# EAGLE board ZumoAdapterboardv1 (EAGLE 6.6.0)
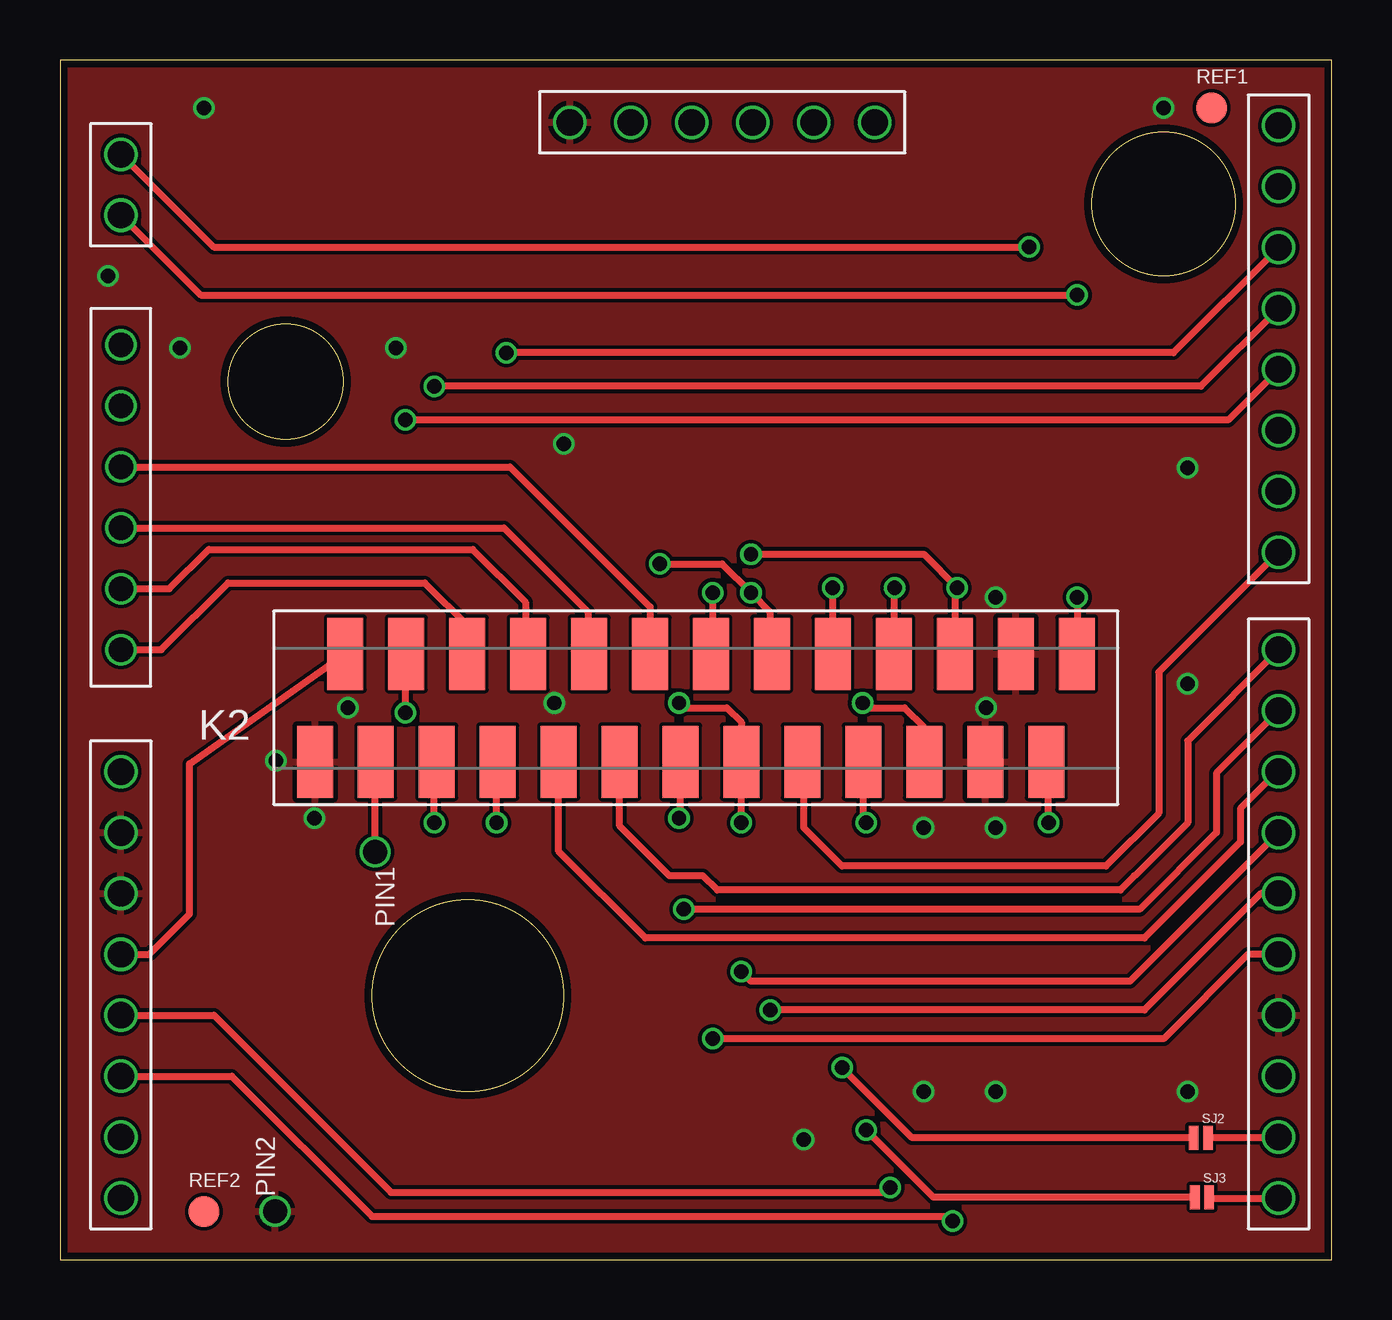
[diagram p0: board, top side]
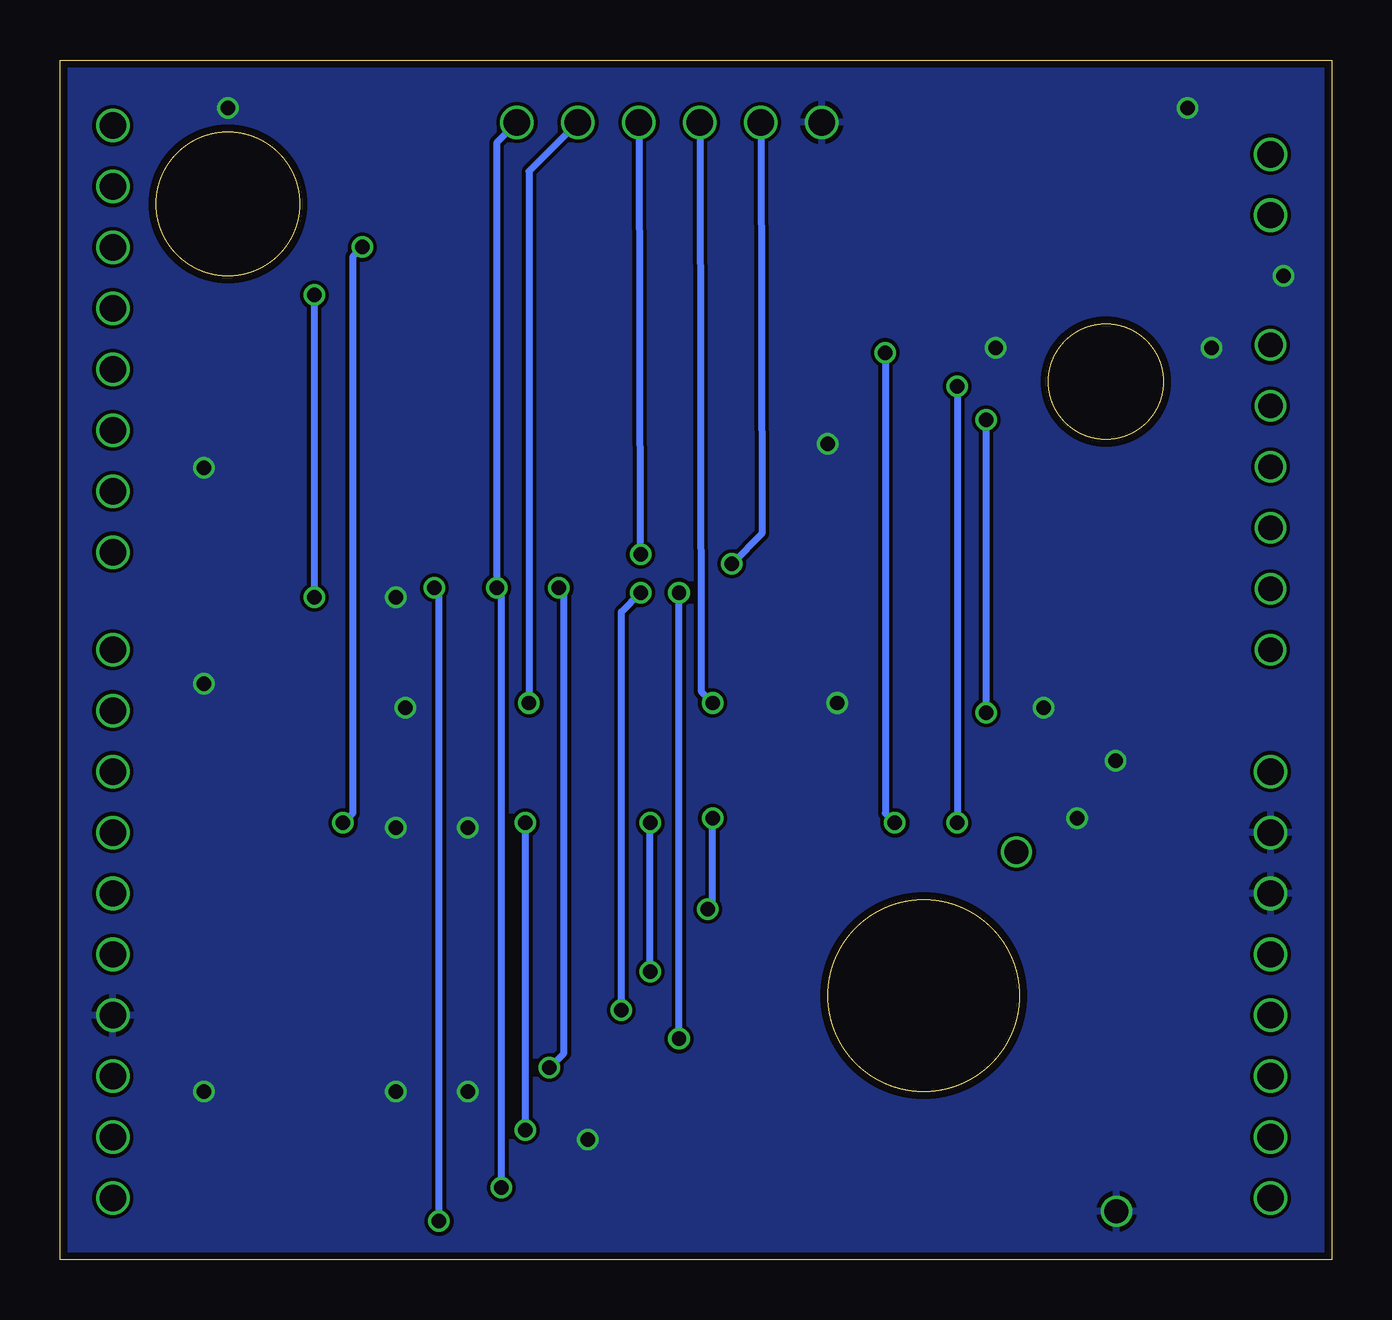
[diagram p1: board, bottom side, seen from below]

Size 53 x 50 mm. Coordinates in mm from the lower left corner, seen from the top.
Outline: 0,0 53,0 53,50 0,50 0,0
Outline: circle at 17,11 radius 4
Outline: circle at 9.4,36.6 radius 2.4
Outline: circle at 46,44 radius 3
Copper layers (1*16): Top 0.035mm / dielectric 1.5mm / Bottom 0.035mm
Design rules "Eagle-DRU - 1109 - LeitOn - 01 and 02 layers KK": minimum track width 0.15mm, minimum drill 0.3mm, track to track 0.15mm, track to pad 0.15mm, pad to pad 0.15mm, via to via 0.15mm, smd to smd 0.15mm, copper to edge 0.3mm, drill to drill 0.3mm, minimum pad ring 0.15mm, minimum via ring 0.15mm, stop-mask expansion 0.05mm, vias tented up to drill 0.3mm, thermal gap 0.2mm
Net classes: 1 sens: width 0.3 mm, drill 0.6 mm, clearance 1.016 mm

## Footprints (pad centres in the part's own frame; a part is rotated, then mirrored left to right if it is on the bottom)
61300611121 = drill 1.1: 1 -6.35,0; 2 -3.81,0; 3 -1.27,0; 4 1.27,0; 5 3.81,0; 6 6.35,0
690357282676 = smd 1.5 x 3: 1 -15.875,-2.25; 2 -14.605,2.25; 3 -13.335,-2.25; 4 -12.065,2.25; 5 -10.795,-2.25; 6 -9.525,2.25; 7 -8.255,-2.25; 8 -6.985,2.25; 9 -5.715,-2.25; 10 -4.445,2.25; 11 -3.175,-2.25; 12 -1.905,2.25; 13 -0.635,-2.25; 14 0.635,2.25; 15 1.905,-2.25; 16 3.175,2.25; 17 4.445,-2.25; 18 5.715,2.25; 19 6.985,-2.25; 20 8.255,2.25; 21 9.525,-2.25; 22 10.795,2.25; 23 12.065,-2.25; 24 13.335,2.25; 25 14.605,-2.25; 26 15.875,2.25
61300811121 = drill 1.1: 1 -8.89,0; 2 -6.35,0; 3 -3.81,0; 4 -1.27,0; 5 1.27,0; 6 3.81,0; 7 6.35,0; 8 8.89,0
61301011121 = drill 1.1: 1 -11.43,0; 2 -8.89,0; 3 -6.35,0; 4 -3.81,0; 5 -1.27,0; 6 1.27,0; 7 3.81,0; 8 6.35,0; 9 8.89,0; 10 11.43,0
61300611821 = drill 1.02: 1 -6.35,0; 2 -3.81,0; 3 -1.27,0; 4 1.27,0; 5 3.81,0; 6 6.35,0
61300211121 = drill 1.1: 1 -1.27,0; 2 1.27,0
SOLDER_PIN_1.0 = drill 1: _ 0,0
PCB-REF = smd 1.27 x 1.27: 0 0,0
SJ-O = smd 0.4 x 1: 1 -0.3,0; 2 0.3,0

## Placement (x,y rotation side)
K1  61300611121  [61300611121]  27.6,47.4 0 top
K2  690357282676  [690357282676]  26.5,23 180 top
K3  61300811121  [61300811121]  2.54,11.45 90 top
K4  61300811121  [61300811121]  50.8,38.37 270 top
K5  61301011121  [61301011121]  50.8,13.99 270 top
K6  61300611821  [61300611821]  2.54,31.77 90 top
K7  61300211121  [61300211121]  2.54,44.8 90 top
PIN1  SOLDER_PIN-1.0  [SOLDER_PIN_1.0]  13.13,16.99 180 top
PIN2  SOLDER_PIN-1.0  [SOLDER_PIN_1.0]  8.96,2.01 0 top
REF1  [PCB-REF]  48,48 0 top
REF2  [PCB-REF]  6,2 0 top
SJ2  SOLDER_JUMPER_OPEN  [SJ-O]  47.55,5.08 0 top
SJ3  SOLDER_JUMPER_OPEN  [SJ-O]  47.6,2.6 0 top

## Library data of the parts
K1-K7 PIN1 PIN2 REF1 REF2 SJ2 SJ3 = MasterPhonebot

## Nets
0: K4.1
1: K4.2
2: K2.20 K4.3
3: K2.22 K4.4
3.3V: K1.6 K2.7 K3.4
4: K2.23 K4.5
5: K4.6
5V: K2.25 K3.5
6: K4.7
7: K2.10 K4.8
8: K2.16 K5.1
9: K2.14 K5.2
10: K2.18 K5.3
11: K1.3 K2.12 K5.4
12: K1.2 K2.11 K5.5
13: K2.13 K5.6
A0: K2.21 K6.1
A1: K2.19 K6.2
A2: K2.17 K6.3
A3: K2.15 K6.4
A4: K6.5
A5: K6.6
AREF: K5.8
GND: K1.1 K2.3 K2.4 K2.26 K3.6 K3.7 K5.7 PIN2._
IO: K3.2
N$1: K2.24 PIN1._
N$2: K2.8 SJ3.1
N$3: K2.9 SJ2.1
REF: K3.1
RST: K1.4 K2.5 K3.3
SCL: K5.10 SJ3.2
SDA: K5.9 SJ2.2
SENSE+ [sens]: K2.2 K7.2
SENSE- [sens]: K2.1 K7.1
TST: K1.5 K2.6
VIN: K3.8

## Tracks (layer width: path | path; a pad name or v marks a point on that pad's centre or on a via)
2  (via drill 0.6)
  Top 0.3: K4.3 46.42,37.8 v18.6,37.8 | v18.2,18.2 18.2,20.69 K2.20
  Bottom 0.3: v18.6,37.8 18.6,18.6 v18.2,18.2
3  (via drill 0.6)
  Top 0.3: K4.4 47.56,36.4 v15.6,36.4 | v15.6,18.2 15.6,20.6 K2.22
  Bottom 0.3: v15.6,36.4 v15.6,18.2
3.3V  (via drill 0.6)
  Top 0.3: K3.4 6.42,10.18 13.8,2.8 34.4,2.8 v34.6,3 | v34.8,28 34.76,27.95 K2.7
  Bottom 0.3: v34.6,3 34.6,27.8 v34.8,28 34.8,46.55 K1.6
4  (via drill 0.6)
  Top 0.3: K4.5 48.7,35 v14.4,35 | v14.4,22.8 14.4,25.21 K2.23
  Bottom 0.3: v14.4,35 v14.4,22.8
5V
  Top 0.3: K3.5 3.72,12.72 5.4,14.4 5.4,20.66 K2.25
7
  Top 0.3: K4.8 45.8,24.48 45.8,18.6 43.6,16.4 32.6,16.4 31,18 31,20.7 K2.10
8
  Top 0.3: K5.1 47,21.62 47,18.2 44.8,16 44.78,16 44.2,15.4 27.4,15.4 26.8,16 25.4,16 23.32,18.07 K2.16
9  (via drill 0.6)
  Top 0.3: K5.2 48.2,20.28 48.2,17.8 45,14.6 v26,14.6 | v25.8,18.4 25.86,18.46 K2.14
  Bottom 0.3: v26,14.6 25.8,14.8 v25.8,18.4
10
  Top 0.3: K5.3 50.74,20.34 49.2,18.8 49.2,17.4 45.2,13.4 24.4,13.4 20.79,17.02 K2.18
11  (via drill 0.6)
  Top 0.3: v28.4,18.2 K2.12 28.4,22.4 27.8,23 26,23 v25.8,23.2 | K5.4 44.6,11.6 28.8,11.6 v28.4,12
  Bottom 0.3: v28.4,12 v28.4,18.2 | K1.3 26.28,23.68 v25.8,23.2
12  (via drill 0.6)
  Top 0.3: v25,29 27.6,29 v28.8,27.8 29.6,27 29.6,25.32 K2.11 | K5.5 50.06,15.26 45.2,10.4 v29.6,10.4
  Bottom 0.3: K1.2 23.74,30.26 v25,29 | v29.6,10.4 29.6,27 v28.8,27.8
13  (via drill 0.6)
  Top 0.3: K5.6 49.52,12.72 46,9.2 v27.2,9.2 | v27.2,27.8 27.2,25.32 K2.13
  Bottom 0.3: v27.2,9.2 v27.2,27.8
A0
  Top 0.3: K6.1 4.22,25.42 7,28.2 15.2,28.2 17,26.4 17,25.27 K2.21
A1
  Top 0.3: K6.2 4.56,27.96 6.2,29.6 17.2,29.6 19.4,27.4 19.4,25.36 K2.19
A2
  Top 0.3: K6.3 18.5,30.5 22,27 22,25.3 K2.17
A3
  Top 0.3: K6.4 18.76,33.04 24.6,27.2 K2.15
GND  (via drill 0.6)
  other vias: 20.6,23.2 36,7 39,7 39,18 36,18 38.6,23 39,27.6 10.6,18.4 12,23 21,34 2,41 6,48 46,48 47,33 47,24 47,7 31,5 9,20.8 14,38 5,38
  pour Top: 0,0 53,0 53,50 0,50
  pour Bottom: 0,0 53,0 53,50 0,50
N$1
  Top 0.3: PIN1._ 13.13,20.71 K2.24
N$2  (via drill 0.6)
  Top 0.3: SJ3.1 36.4,2.6 v33.6,5.4 | v33.6,18.2 33.48,18.32 K2.8
  Bottom 0.3: v33.6,5.4 v33.6,18.2
N$3  (via drill 0.6)
  Top 0.3: SJ2.1 35.52,5.08 v32.6,8 | v32.2,28 32.2,25.27 K2.9
  Bottom 0.3: v32.6,8 32,8.6 32,27.8 v32.2,28
RST  (via drill 0.6)
  Top 0.3: K3.3 7.16,7.64 13,1.8 37,1.8 v37.2,1.6 | K2.5 37.3,27.89 v37.4,28 36,29.4 v28.8,29.4
  Bottom 0.3: v37.2,1.6 37.2,27.8 v37.4,28 | K1.4 28.82,29.42 v28.8,29.4
SCL
  Top 0.3: SJ3.2 47.94,2.56 K5.10
SDA
  Top 0.3: SJ2.2 47.87,5.1 K5.9
SENSE+  (via drill 0.6)
  Top 0.3: K7.2 6.41,42.2 v40.4,42.2 | v41.2,18.2 41.2,20.66 K2.2
  Bottom 0.3: v40.4,42.2 40.8,41.8 40.8,18.6 v41.2,18.2
SENSE-  (via drill 0.6)
  Top 0.3: K7.1 5.87,40.2 v42.4,40.2 | v42.4,27.6 42.4,25.27 K2.1
  Bottom 0.3: v42.4,40.2 v42.4,27.6
TST  (via drill 0.6)
  Top 0.3: v33.45,23.2 33.4,23.2 33.6,23 35.2,23 36,22.2 36,20.77 K2.6
  Bottom 0.3: K1.5 33.45,45.36 v33.45,23.2

## Text on the board
tStop: GND | VCC | TXD | RXD | RST | TST